# Altium PCB ATU.PcbDoc (part 1 of 2)
Units mm, origin at the board's own origin, x right, y up, seen from the top; angles counter-clockwise.
Board outline 168 x 90 mm, 2 copper layers (Top Layer, Bottom Layer), stack 1.571 mm thick; 161 components, 107 nets, 611 pads, 1151 vias.
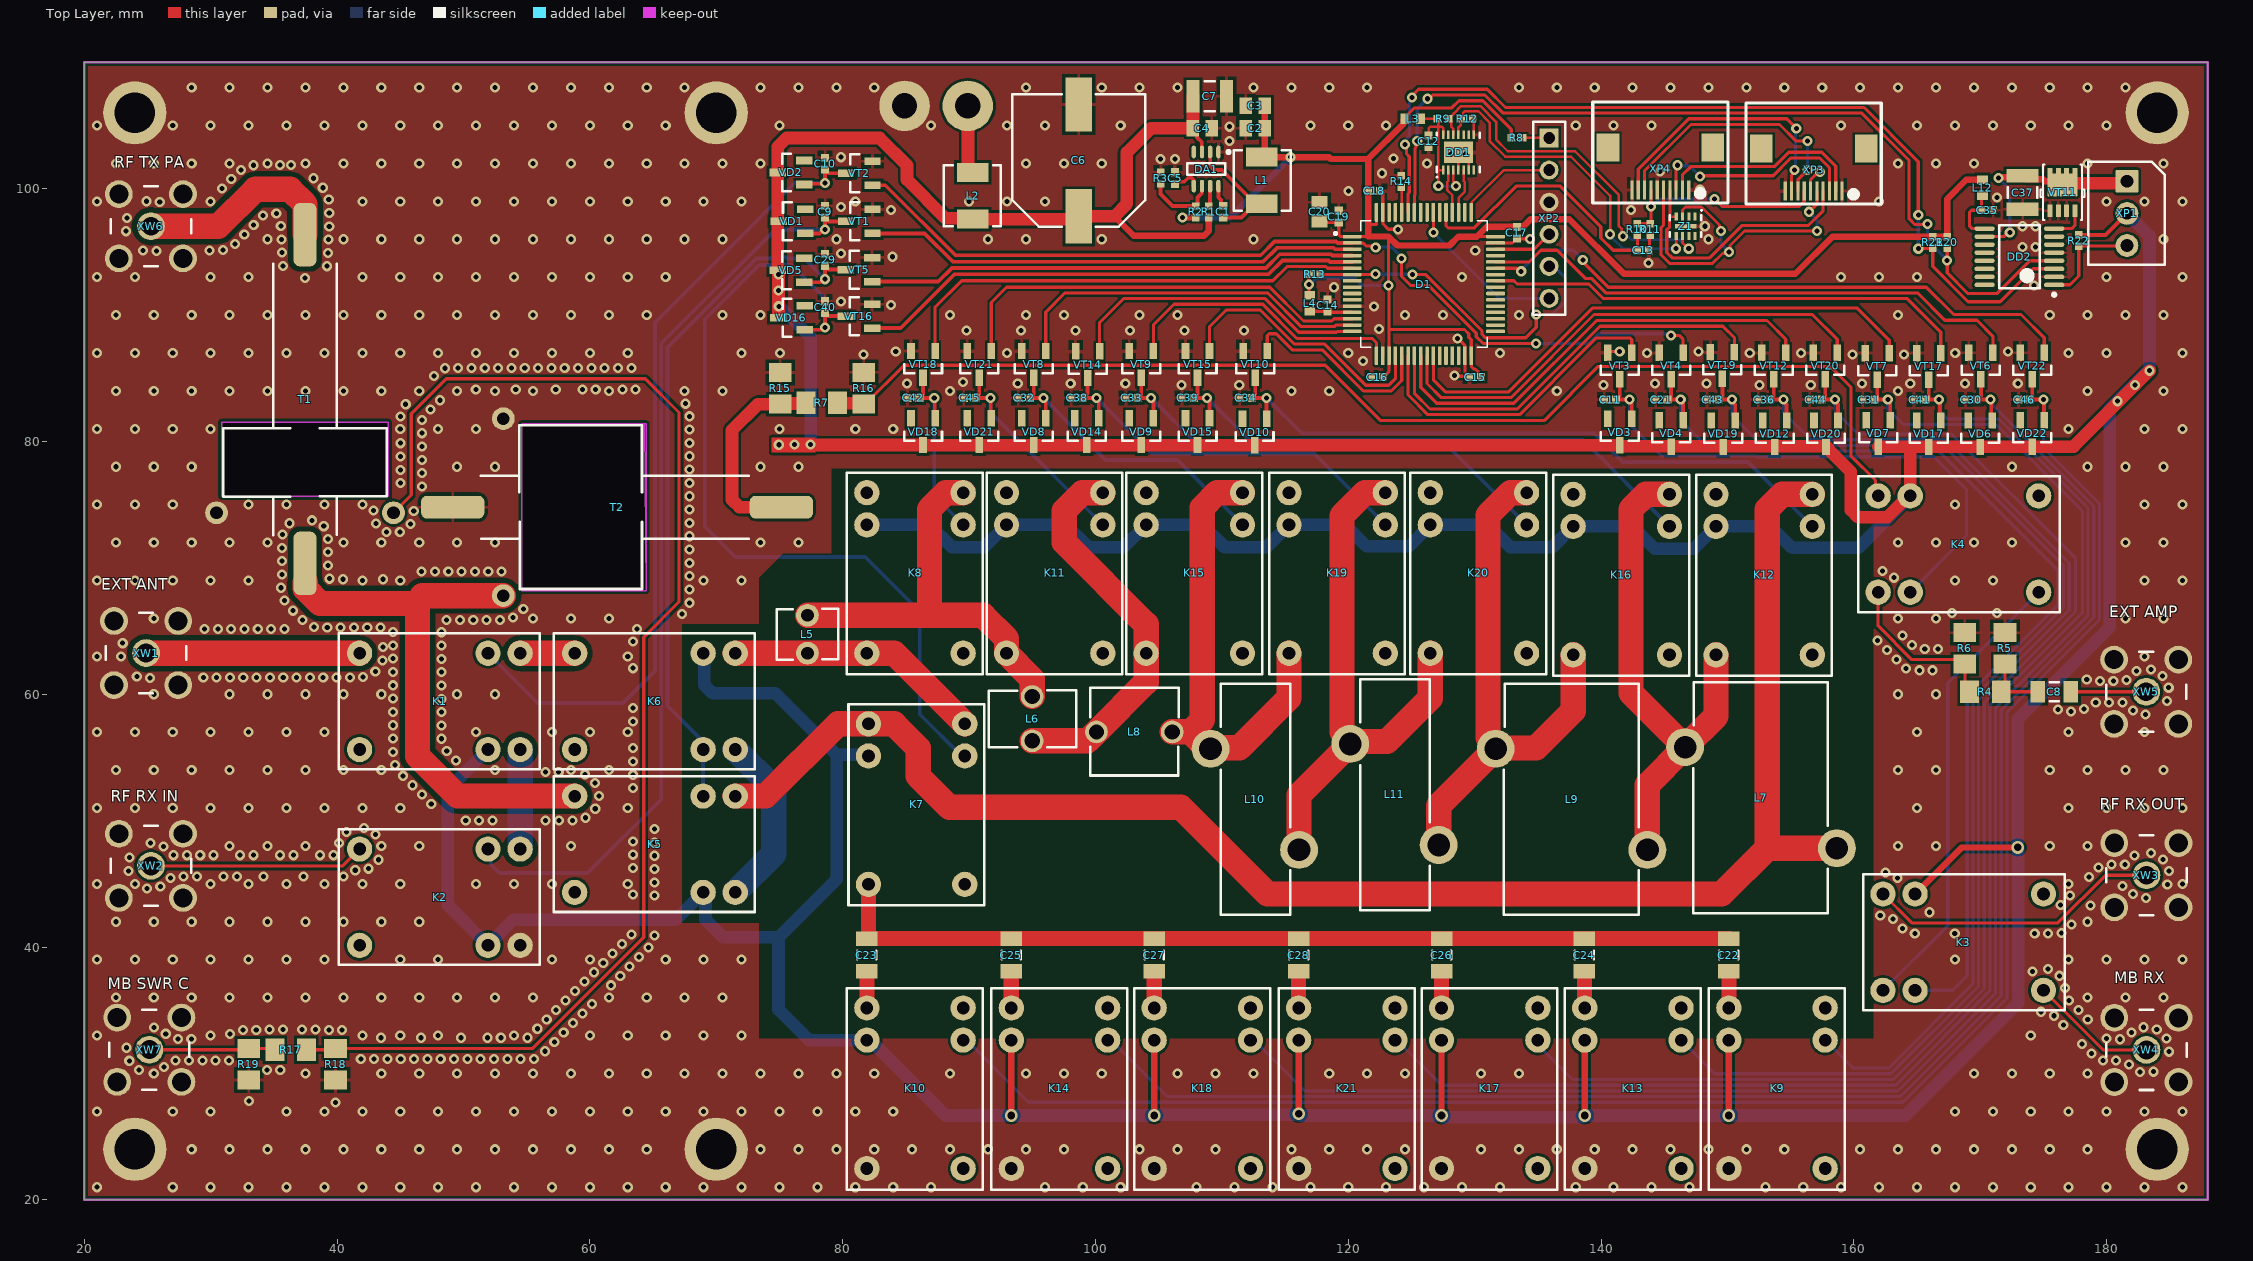
[diagram p0: Top Layer view]
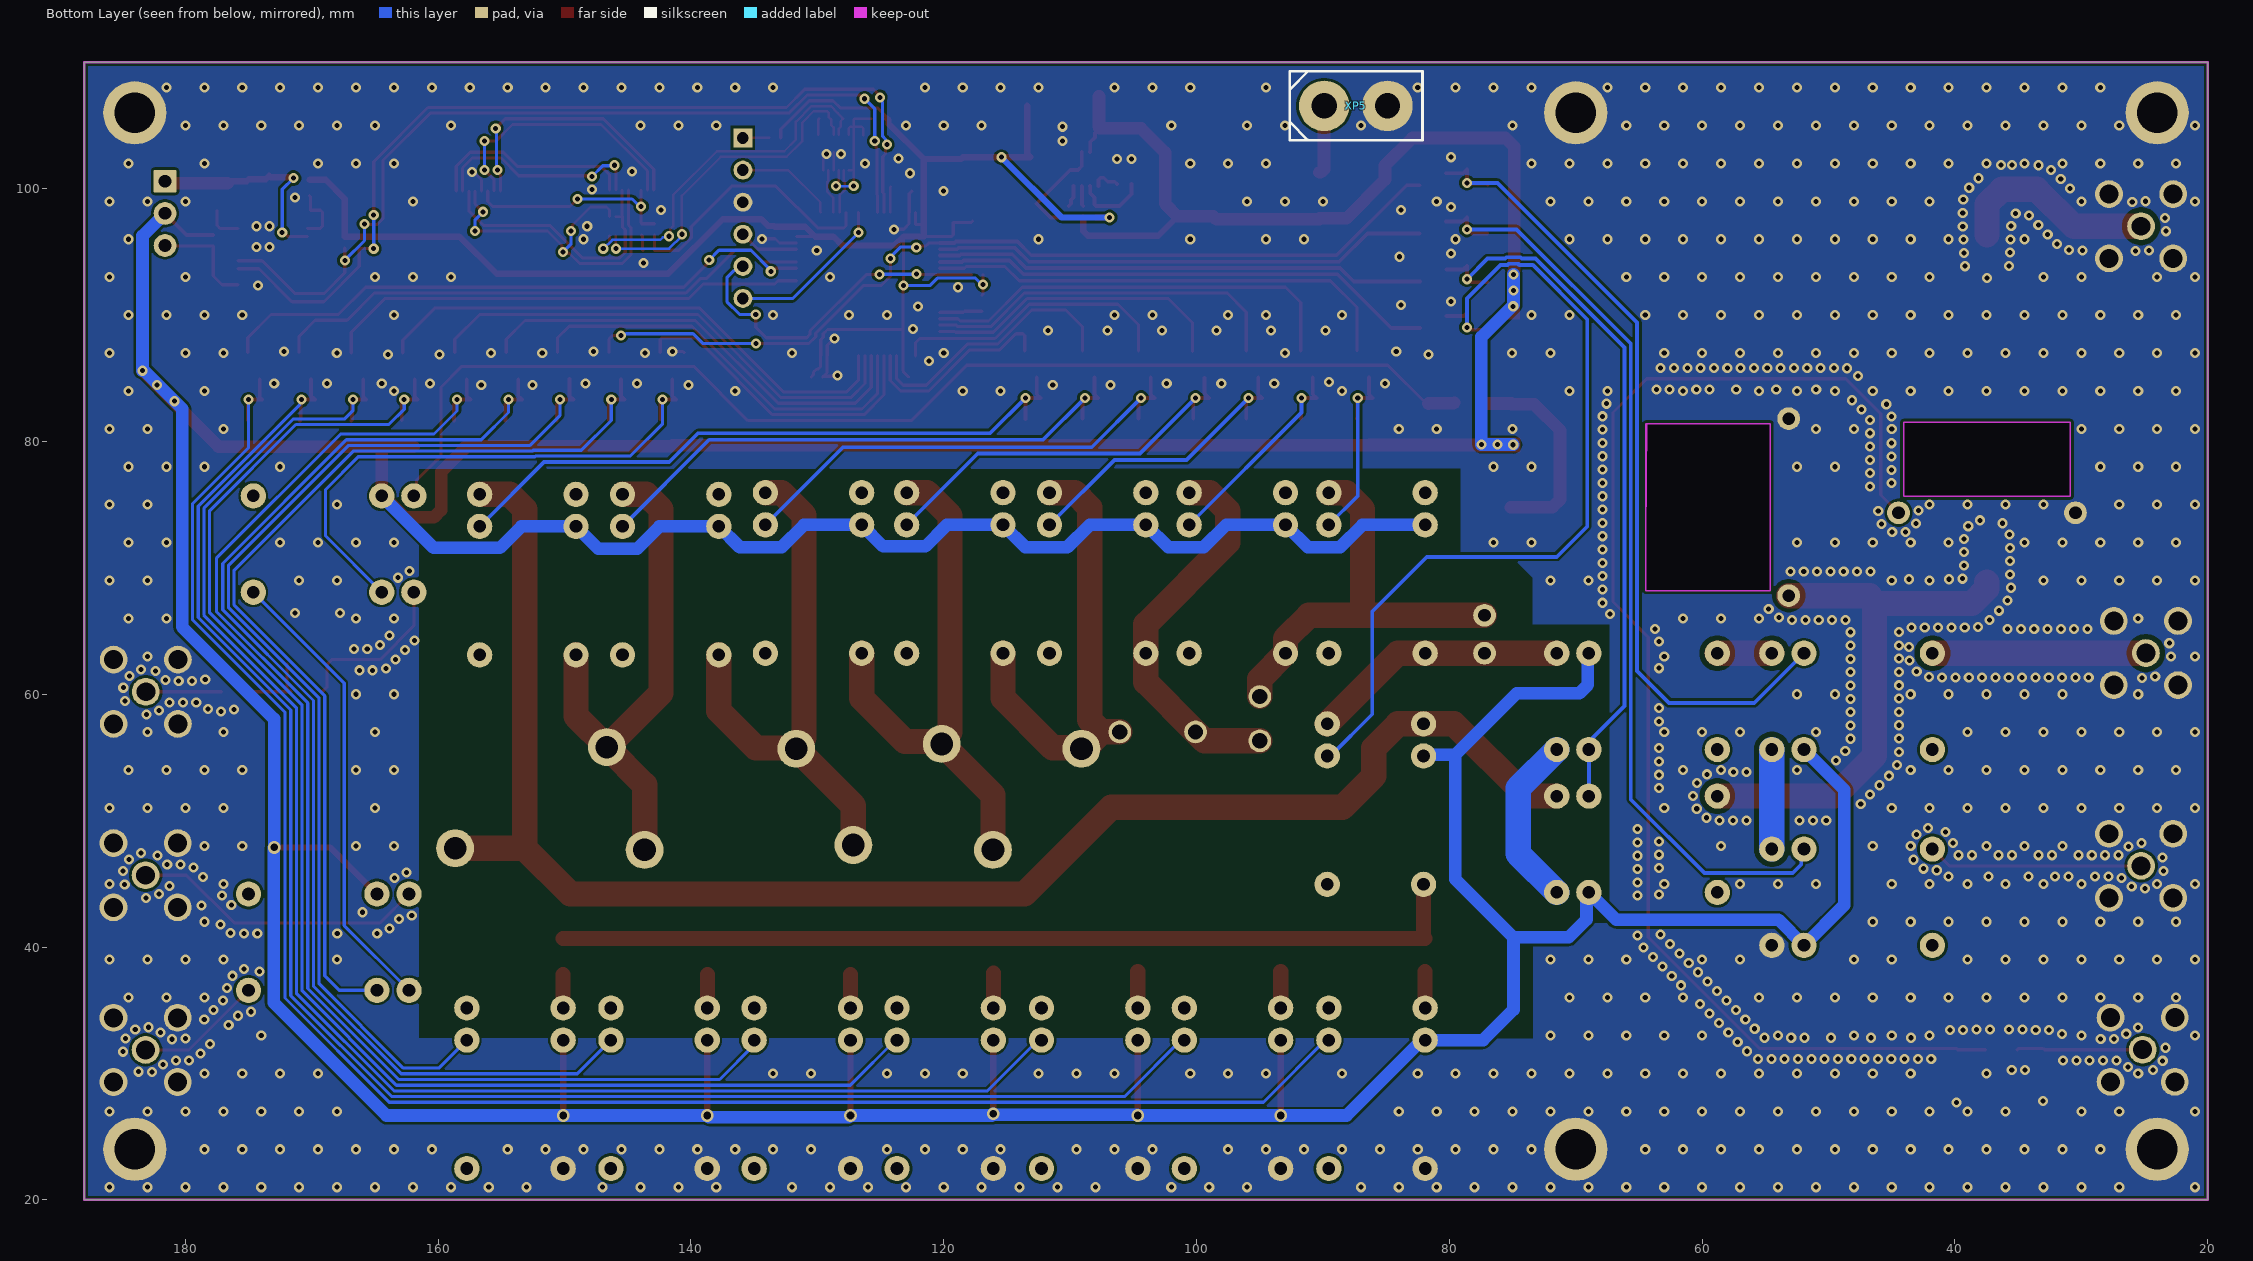
[diagram p1: Bottom Layer view, seen from below]

## Layer stack, top to bottom
Top Solder: solder mask 0.0102, Solder Resist, Dk 3.5
Top Layer: signal copper 0.0356
Dielectric 1: dielectric 1.5, FR-4, Dk 4.8
Bottom Layer: signal copper 0.0356
Bottom Solder: solder mask 0.0102, Solder Resist, Dk 3.5

## Board outline
20,20 188,20 188,110 20,110
cut-out: 54.61,81.407 54.61,68.199 64.452,68.199 64.325,81.407
cut-out: 30.861,81.534 44.069,81.534 44.069,75.658 30.861,75.658

## Design rules (kind name [scope] priority, off if disabled: settings)
Clearance Clearance_1 [(InNet('ATU_LC_IN') OR InNet('NetK1_1') OR InNet('NetT1_2') OR InNet('ATU_LC_OUT') OR InNet('NetK1_7'))] p1: gap=0.4 ignorepadtopadclearanceinfootprint=FALSE
Clearance [All] p2: gap=0.2 ignorepadtopadclearanceinfootprint=FALSE
HoleSize [All] p1: absolutevalues=TRUE maxlimit=5 minlimit=0.2 maxpercent=80.000 minpercent=20.000
PlaneConnect [All] p1: pad.planeconnectstyle=Relief pad.reliefexpansion=0.508 pad.reliefentries=4 pad.reliefconductorwidth=0.254 pad.reliefairgap=0.254 via.planeconnectstyle=Direct via.reliefexpansion=0.508 via.reliefentries=4 via.reliefconductorwidth=0.254 via.reliefairgap=0.254
PolygonConnect [All] p1: thpad.connectstyle=Direct thpad.reliefconductorwidth=0.254 thpad.reliefentries=4 thpad.polygonreliefangle="90 Angle" thpad.airgapwidth=0.254 smdpad.connectstyle=Relief smdpad.reliefconductorwidth=0.254 smdpad.reliefentries=4 smdpad.polygonreliefangle="90 Angle" smdpad.airgapwidth=0.254 via.connectstyle=Direct via.reliefconductorwidth=0.254 via.reliefentries=4 via.polygonreliefangle="90 Angle" via.airgapwidth=0.254
RoutingVias [All] p1: holewidth=0.4 width=0.8 viastyle="Through Hole" minholewidth=0.3 minwidth=0.7 maxholewidth=3.5 maxwidth=6
SolderMaskExpansion [All] p1: expansion=0.102 istentingtop=FALSE
SupplyNets "Schematic Supply Nets_10" [InNet('I2C_SCL')] p1: voltage=0.000
SupplyNets "Schematic Supply Nets_8" [InNet('I2C_SDA')] p2: voltage=0.000
SupplyNets "Schematic Supply Nets_54" [InNet('SEL_C0')] p3: voltage=0.000
SupplyNets "Schematic Supply Nets_53" [InNet('CON_RS422A')] p4: voltage=0.000
SupplyNets "Schematic Supply Nets_52" [InNet('RELAY_CSEL')] p5: voltage=0.000
SupplyNets "Schematic Supply Nets_51" [InNet('RELAY_L1')] p6: voltage=0.000
SupplyNets "Schematic Supply Nets_50" [InNet('RELAY_RXEN')] p7: voltage=0.000
SupplyNets "Schematic Supply Nets_49" [InNet('RX_EN')] p8: voltage=0.000
SupplyNets "Schematic Supply Nets_46" [InNet('PWR_EN')] p9: voltage=0.000
SupplyNets "Schematic Supply Nets_45" [InNet('CON_TXON')] p10: voltage=0.000
SupplyNets "Schematic Supply Nets_44" [InNet('RELAY_L2')] p11: voltage=0.000
SupplyNets "Schematic Supply Nets_43" [InNet('VDD_12V')] p12: voltage=0.000
SupplyNets "Schematic Supply Nets_42" [InNet('RELAY_C5')] p13: voltage=0.000
SupplyNets "Schematic Supply Nets_41" [InNet('RELAY_L6')] p14: voltage=0.000
SupplyNets "Schematic Supply Nets_40" [InNet('CON_RS422Z')] p15: voltage=0.000
SupplyNets "Schematic Supply Nets_39" [InNet('EXT_AMP')] p16: voltage=0.000
SupplyNets "Schematic Supply Nets_38" [InNet('SEL_C2')] p17: voltage=0.000
SupplyNets "Schematic Supply Nets_37" [InNet('RELAY_L4')] p18: voltage=0.000
SupplyNets "Schematic Supply Nets_36" [InNet('BYPASS0')] p19: voltage=0.000
SupplyNets "Schematic Supply Nets_35" [InNet('RELAY_L5')] p20: voltage=0.000
SupplyNets "Schematic Supply Nets_34" [InNet('SEL_L6')] p21: voltage=0.000
SupplyNets "Schematic Supply Nets_33" [InNet('RELAY_C0')] p22: voltage=0.000
SupplyNets "Schematic Supply Nets_32" [InNet('GND')] p23: voltage=0.000
SupplyNets "Schematic Supply Nets_31" [InNet('SEL_L4')] p24: voltage=0.000
SupplyNets "Schematic Supply Nets_30" [InNet('SEL_L5')] p25: voltage=0.000
SupplyNets "Schematic Supply Nets_29" [InNet('CON_RS422B')] p26: voltage=0.000
SupplyNets "Schematic Supply Nets_28" [InNet('RELAY_TXEN2')] p27: voltage=0.000
SupplyNets "Schematic Supply Nets_27" [InNet('RELAY_EXTA')] p28: voltage=0.000
SupplyNets "Schematic Supply Nets_26" [InNet('SEL_C4')] p29: voltage=0.000
SupplyNets "Schematic Supply Nets_25" [InNet('RELAY_TXEN')] p30: voltage=0.000
SupplyNets "Schematic Supply Nets_24" [InNet('RELAY_C4')] p31: voltage=0.000
SupplyNets "Schematic Supply Nets_23" [InNet('RELAY_C3')] p32: voltage=0.000
SupplyNets "Schematic Supply Nets_22" [InNet('VDD_3V3')] p33: voltage=0.000
SupplyNets "Schematic Supply Nets_21" [InNet('SEL_L3')] p34: voltage=0.000
SupplyNets "Schematic Supply Nets_20" [InNet('CAP_SEL')] p35: voltage=0.000
SupplyNets "Schematic Supply Nets_19" [InNet('RELAY_L3')] p36: voltage=0.000
SupplyNets "Schematic Supply Nets_18" [InNet('ATU_LC_IN')] p37: voltage=0.000
SupplyNets "Schematic Supply Nets_17" [InNet('SEL_L1')] p38: voltage=0.000
SupplyNets "Schematic Supply Nets_16" [InNet('RELAY_L7')] p39: voltage=0.000
SupplyNets "Schematic Supply Nets_15" [InNet('SEL_L7')] p40: voltage=0.000
SupplyNets "Schematic Supply Nets_14" [InNet('RELAY_BYP0')] p41: voltage=0.000
SupplyNets "Schematic Supply Nets_13" [InNet('SEL_L2')] p42: voltage=0.000
SupplyNets "Schematic Supply Nets_12" [InNet('RELAY_C6')] p43: voltage=0.000
SupplyNets "Schematic Supply Nets_11" [InNet('SEL_C5')] p44: voltage=0.000
SupplyNets "Schematic Supply Nets_9" [InNet('CON_TX_FAIL')] p45: voltage=0.000
SupplyNets "Schematic Supply Nets_7" [InNet('RELAY_C2')] p46: voltage=0.000
SupplyNets "Schematic Supply Nets_6" [InNet('CON_RS422Y')] p47: voltage=0.000
SupplyNets "Schematic Supply Nets_5" [InNet('SEL_C6')] p48: voltage=0.000
SupplyNets "Schematic Supply Nets_4" [InNet('ATU_LC_OUT')] p49: voltage=0.000
SupplyNets "Schematic Supply Nets_3" [InNet('SEL_C1')] p50: voltage=0.000
SupplyNets "Schematic Supply Nets_2" [InNet('SEL_C3')] p51: voltage=0.000
SupplyNets "Schematic Supply Nets_1" [InNet('RELAY_C1')] p52: voltage=0.000
SupplyNets "Schematic Supply Nets" [InNet('TX_EN')] p53: voltage=0.000
Width [All] p1: maxlimit=10 minlimit=0.2 preferedwidth=0.3
28 further rules are at their usual default settings.

## Classes and differential pairs
component class ATU_RF: C8 C9 C10 C11 C21 K1 K2 K3 K4 R4 R5 R6 R7 R15 R16 R17 R18 R19 T1 T2 VD1 VD2 VD3 VD4 VT1 VT2 VT3 VT4 XW1 XW2 XW3 XW4 XW5 XW6 XW7
component class ATU_MCU: C1 C2 C3 C4 C5 C6 C7 C12 C13 C14 C15 C16 C17 C18 C19 C20 C35 C37 D1 DA1 DD1 DD2 L1 L2 L3 L4 L12 R1 R2 R3 R8 R9 R10 R11 R12 R13 R14 R20 R21 R22 VT11 XP1 XP2 XP3 XP4 XP5 Z1
component class ATU_LC: C22 C23 C24 C25 C26 C27 C28 C29 C30 C31 C32 C33 C34 C36 C38 C39 C40 C41 C42 C43 C44 C45 C46 K5 K6 K7 K8 K9 K10 K11 K12 K13 K14 K15 K16 K17 K18 K19 K20 K21 L5 L6 L7 L8 L9 L10 L11 VD5 VD6 VD7 VD8 VD9 VD10 VD12 VD14 VD15 VD16 VD17 VD18 VD19 VD20 VD21 VD22 VT5 VT6 VT7 VT8 VT9 VT10 VT12 VT14 VT15 VT16 VT17 VT18 VT19 VT20 VT21 VT22

## Components (designator, comment, footprint, x,y, rotation, side; value= is the part's Value field where it differs from the comment)
C1 "0.1мк" CAPC1005X06N 110.109,98.171 r90 top
C2 "22мк" CAPC2012X12L 112.649,104.775 r0 top
C3 "22мк" CAPC2012X12L 112.649,106.553 r0 top
C4 "22мк" CAPC2012X12L 108.446,104.775 r180 top
C5 "8200" CAPC1005X06N 106.299,100.838 r270 top
C6 "470мк" CAPAE116103X105N 98.679,102.235 r90 top
C7 "10мк" CAPC3225X27L 109.038,107.315 r180 top
C8 "2200" CAPC3216X19L 175.865,60.198 r0 top
C9 "0.01мк" CAPC1005X06N 78.613,98.171 r270 top
C10 "0.01мк" CAPC1005X06N 78.613,101.981 r270 top
C11 "0.01мк" CAPC1005X06N 140.716,83.312 r0 top
C12 "1мк" CAPC1005X06N 126.365,103.759 r90 top
C13 "0.01мк" CAPC1005X06N 143.335,95.123 r180 top
C14 "0.1мк" CAPC1005X06N 118.364,90.757 r270 top
C15 "0.1мк" CAPC1005X06N 130.048,85.09 r0 top
C16 "0.1мк" CAPC1005X06N 122.301,85.09 r0 top
C17 "0.1мк" CAPC1005X06N 133.35,96.52 r90 top
C18 "0.1мк" CAPC1005X06N 122.047,99.822 r180 top
C19 "0.1мк" CAPC1005X06N 119.253,97.79 r270 top
C20 "22мк" CAPC2012X12L 117.729,98.171 r270 top
C21 "0.01мк" CAPC1005X06N 144.78,83.312 r0 top
C22 "22" CAPC3216X19L 150.114,39.37 r270 top
C23 "10" CAPC3216X19L 81.915,39.37 r90 top
C24 "100" CAPC3216X19L 138.684,39.37 r270 top
C25 "47" CAPC3216X19L 93.345,39.37 r90 top
C26 "470" CAPC3216X19L 127.381,39.37 r270 top
C27 "220" CAPC3216X19L 104.648,39.37 r90 top
C28 "1000" CAPC3216X19L 116.078,39.37 r90 top
C29 "0.01мк" CAPC1005X06N 78.613,94.361 r270 top
C30 "0.01мк" CAPC1005X06N 169.291,83.312 r0 top
C31 "0.01мк" CAPC1005X06N 161.163,83.312 r0 top
C32 "0.01мк" CAPC1005X06N 94.361,83.439 r0 top
C33 "0.01мк" CAPC1005X06N 102.87,83.439 r0 top
C34 "0.01мк" CAPC1005X06N 111.887,83.439 r0 top
C35 "0.1мк" CAPC1005X06N 170.561,98.298 r180 top
C36 "0.01мк" CAPC1005X06N 152.908,83.312 r0 top
C37 "10мк" CAPC3225X27L 173.355,99.695 r90 top
C38 "0.01мк" CAPC1005X06N 98.552,83.439 r0 top
C39 "0.01мк" CAPC1005X06N 107.315,83.439 r0 top
C40 "0.01мк" CAPC1005X06N 78.613,90.63 r270 top
C41 "0.01мк" CAPC1005X06N 165.227,83.312 r0 top
C42 "0.01мк" CAPC1005X06N 85.598,83.439 r0 top
C43 "0.01мк" CAPC1005X06N 148.844,83.312 r0 top
C44 "0.01мк" CAPC1005X06N 156.972,83.312 r0 top
C45 "0.01мк" CAPC1005X06N 90.043,83.439 r0 top
C46 "0.01мк" CAPC1005X06N 173.482,83.312 r0 top
D1 "STM32F103RCT6" QFP50P1200X1200X160-64N 125.984,92.456 r0 top
DA1 "TPS563210A" TSOP65P280X110-8N 108.753,101.553 r270 top
DD1 "MAX13433EETD+" SON40P300X80_HS-15L 128.721,102.868 r90 top
DD2 "MAX6650EUB" SOP64P600X175-16N 173.101,94.615 r180 top
K1 "HJR4102-L-12VDC-S-Z" HJR4102 51.943,55.626 r0 top
K2 "HJR4102-L-12VDC-S-Z" HJR4102 51.943,40.132 r0 top
K3 "HJR4102-L-12VDC-S-Z" HJR4102 164.846,44.196 r180 top
K4 "HJR4102-L-12VDC-S-Z" HJR4102 164.465,75.692 r180 top
K5 "HJR4102-L-12VDC-S-Z" HJR4102 68.961,44.323 r0 top
K6 "HJR4102-L-12VDC-S-Z" HJR4102 68.961,55.626 r0 top
K7 "HJR4102-L-12VDC-S-Z" HJR4102 89.662,55.118 r90 top
K8 "HJR4102-L-12VDC-S-Z" HJR4102 89.535,73.406 r90 top
K9 "HJR4102-L-12VDC-S-Z" HJR4102 157.734,32.639 r90 top
K10 "HJR4102-L-12VDC-S-Z" HJR4102 89.535,32.639 r90 top
K11 "HJR4102-L-12VDC-S-Z" HJR4102 100.584,73.406 r90 top
K12 "HJR4102-L-12VDC-S-Z" HJR4102 156.718,73.279 r90 top
K13 "HJR4102-L-12VDC-S-Z" HJR4102 146.334,32.639 r90 top
K14 "HJR4102-L-12VDC-S-Z" HJR4102 100.965,32.639 r90 top
K15 "HJR4102-L-12VDC-S-Z" HJR4102 111.633,73.406 r90 top
K16 "HJR4102-L-12VDC-S-Z" HJR4102 145.415,73.279 r90 top
K17 "HJR4102-L-12VDC-S-Z" HJR4102 135.001,32.639 r90 top
K18 "HJR4102-L-12VDC-S-Z" HJR4102 112.268,32.639 r90 top
K19 "HJR4102-L-12VDC-S-Z" HJR4102 122.936,73.406 r90 top
K20 "HJR4102-L-12VDC-S-Z" HJR4102 134.112,73.406 r90 top
K21 "HJR4102-L-12VDC-S-Z" HJR4102 123.698,32.639 r90 top
L1 "2,2мкГн" CSAB0420 113.157,100.656 r90 top
L2 "2,2мкГн" CSAB0420 90.297,99.441 r270 top
L3 "BLM18PG121SN1D" INDC1608X08L 125.095,105.537 r0 top
L4 "BLM18PG121SN1D" INDC1608X08L 116.967,90.932 r90 top
L5 "50 нГн" "COIL D4 W3 L3" 77.216,63.246 r90 top
L6 "100 нГн" "COIL D6.4 W4 L3.5" 94.996,59.817 r270 top
L7 "4.17vrГн" T68-2x2 152.654,51.816 r90 top
L8 "220 нГн" "COIL D6.4 W7 L6" 100.076,57.023 r0 top
L9 "1.93vrГн" T68-2x2 137.668,51.689 r90 top
L10 "462 нГн" T68-2 110.109,51.689 r90 top
L11 "963 нГн" T68-2 121.158,52.07 r90 top
L12 "BLM18PG121SN1D" INDC1608X08L 170.18,100.076 r270 top
R1 "10к" RESC1005X06N 108.966,98.171 r270 top
R2 "33к" RESC1005X06N 107.95,98.171 r270 top
R3 "10к" RESC1005X06N 105.156,100.838 r90 top
R4 "240" RESC3216X04L 170.414,60.198 r180 top
R5 "62" RESC3216X04L 171.958,63.627 r270 top
R6 "62" RESC3216X04L 168.783,63.627 r270 top
R7 "68" RESC3216X04L 78.359,83.058 r0 top
R8 "100" RESC1005X06N 133.35,104.013 r0 top
R9 "180к" RESC1005X06N 127.508,105.537 r180 top
R10 "100" RESC1005X06N 142.875,96.774 r270 top
R11 "10к" RESC1005X06N 143.891,96.774 r270 top
R12 "180к" RESC1005X06N 129.413,105.537 r180 top
R13 "10к" RESC1005X06N 117.348,93.218 r180 top
R14 "100" RESC1005X06N 124.206,100.584 r90 top
R15 "100" RESC3216X04L 75.057,84.201 r270 top
R16 "100" RESC3216X04L 81.661,84.221 r270 top
R17 "68" RESC3216X04L 36.322,31.877 r180 top
R18 "100" RESC3216X04L 39.878,30.734 r90 top
R19 "100" RESC3216X04L 33.02,30.734 r90 top
R20 "4.7к" RESC1005X06N 167.386,95.758 r90 top
R21 "4.7к" RESC1005X06N 166.243,95.758 r90 top
R22 "10к" RESC1005X06N 177.8,95.885 r90 top
T1 "Трансформатор SWR_CURRENT" "TRSF PA CURRENT" 37.465,78.359 r90 top
T2 "Трансформатор SWR_VOLTAGE" "TRSF PA VOLTAGE" 57.15,74.803 r0 top
VD1 "BAS16" SOT23_N 75.98,97.409 r180 top
VD2 "BAS16" SOT23_N 75.912,101.28 r180 top
VD3 "BAS16" SOT23_N 141.478,80.738 r270 top
VD4 "BAS16" SOT23_N 145.542,80.645 r270 top
VD5 "BAS16" SOT23_N 75.912,93.538 r180 top
VD6 "BAS16" SOT23_N 169.987,80.611 r270 top
VD7 "BAS16" SOT23_N 161.925,80.645 r270 top
VD8 "BAS16" SOT23_N 95.123,80.772 r270 top
VD9 "BAS16" SOT23_N 103.632,80.772 r270 top
VD10 "BAS16" SOT23_N 112.588,80.738 r270 top
VD12 "BAS16" SOT23_N 153.731,80.611 r270 top
VD14 "BAS16" SOT23_N 99.314,80.772 r270 top
VD15 "BAS16" SOT23_N 108.077,80.772 r270 top
VD16 "BAS16" SOT23_N 75.946,89.789 r180 top
VD17 "BAS16" SOT23_N 165.928,80.611 r270 top
VD18 "BAS16" SOT23_N 86.36,80.772 r270 top
VD19 "BAS16" SOT23_N 149.667,80.611 r270 top
VD20 "BAS16" SOT23_N 157.8,80.611 r270 top
VD21 "BAS16" SOT23_N 90.805,80.772 r270 top
VD22 "BAS16" SOT23_N 174.117,80.645 r270 top
VT1 "PDTC114ET" SOT23_N 81.314,97.409 r180 top
VT2 "PDTC114ET" SOT23_N 81.314,101.219 r180 top
VT3 "PDTC114ET" SOT23_N 141.478,85.979 r270 top
VT4 "PDTC114ET" SOT23_N 145.542,85.979 r270 top
VT5 "PDTC114ET" SOT23_N 81.28,93.599 r180 top
VT6 "PDTC114ET" SOT23_N 170.053,85.979 r270 top
VT7 "PDTC114ET" SOT23_N 161.859,85.945 r270 top
VT8 "PDTC114ET" SOT23_N 95.123,86.106 r270 top
VT9 "PDTC114ET" SOT23_N 103.632,86.106 r270 top
VT10 "PDTC114ET" SOT23_N 112.649,86.106 r270 top
VT11 "SiSS10DN" PowerPAK_1212-8W 176.53,99.822 r90 top
VT12 "PDTC114ET" SOT23_N 153.67,85.979 r270 top
VT14 "PDTC114ET" SOT23_N 99.38,86.072 r270 top
VT15 "PDTC114ET" SOT23_N 108.077,86.106 r270 top
VT16 "PDTC114ET" SOT23_N 81.28,89.916 r180 top
VT17 "PDTC114ET" SOT23_N 165.928,85.945 r270 top
VT18 "PDTC114ET" SOT23_N 86.36,86.106 r270 top
VT19 "PDTC114ET" SOT23_N 149.606,86.013 r270 top
VT20 "PDTC114ET" SOT23_N 157.734,85.979 r270 top
VT21 "PDTC114ET" SOT23_N 90.805,86.106 r270 top
VT22 "PDTC114ET" SOT23_N 174.117,85.979 r270 top
XP1 "22232031" 22232031 181.61,98.044 r90 top
XP2 "PLS-6" HDR1X6 135.89,104.013 r270 top
XP3 "FH12-10S-0.5SVA" FH12-10S-0.5SH 156.825,99.822 r180 top
XP4 "FH12-10S-0.5SVA" FH12-10S-0.5SH 144.694,99.901 r180 top
XP5 "XT30UPB-M" XT30UPB-M 87.399,106.553 r180 bottom
XW1 "SMA-JR" SMA-JR 24.892,63.259 r270 top
XW2 "SMA-JR" SMA-JR 25.273,46.425 r270 top
XW3 "SMA-JR" SMA-JR 183.147,45.682 r90 top
XW4 "SMA-JR" SMA-JR 183.147,31.864 r90 top
XW5 "SMA-JR" SMA-JR 183.134,60.198 r90 top
XW6 "SMA-JR" SMA-JR 25.273,97.028 r270 top
XW7 "SMA-JR" SMA-JR 25.146,31.877 r270 top
Z1 "EClamp2394P" SON50P160X65_HS-9N 146.697,97.031 r270 top

## Footprints (in the part's own frame and the unit in brackets; to place one, negate y for a bottom-side part, rotate by r counter-clockwise, add the part's x,y. Pads: shape width x height; smd on the part's side, far side on the other; paste and mask are expansions set on the pad)
22232031 [mm]
  rrect10% 1.8x1.8 hole 1 mask+0.05: 1(2.54,0)
  round 1.8 hole 1 mask+0.05: 2(0,0) 3(-2.54,0)
  silkscreen extent -4.08,-3 4.1,3.08, body extent -3.81,-2.9 3.81,2.9, height 11.72
CAPAE116103X105N [mm] "Aluminum Electrolytic Capacitor, Body 10,30x10,30x10,50mm, IPC Medium Density"
  rect 4.3x2.1 smd: 1(-4.425,0) 2(4.425,0)
  silkscreen extent -5.25,-5.25 5.25,5.25, body extent -5.5,-5.2 5.5,5.2, height 10.41
CAPC1005X06N [mm] "Chip Capacitor, 2-Leads, Body 1,00x0,50mm, IPC Medium Density"
  rect 0.64x0.64 smd mask+0.05: 1(-0.46,0) 2(0.46,0)
  body extent -0.55,-0.3 0.55,0.3, height 0.6
CAPC2012X12L [mm] "Chip Capacitor, 2-Leads, Body 2,00x1,25mm, IPC High Density"
  rect 1x1.3 smd mask+0.05: 1(-0.75,0) 2(0.75,0)
  body extent -1.05,-0.67 1.05,0.67, height 1.25
CAPC3216X19L [mm] "Chip Capacitor, 2-Leads, Body 3,20x1,60mm, IPC High Density"
  rect 1.15x1.7 smd: 1(-1.3,0) 2(1.3,0)
  silkscreen extent -0.35,-0.75 0.35,0.75, body extent -1.68,-0.87 1.68,0.87, height 1.9
CAPC3225X27L [mm] "Chip Capacitor, 2-Leads, Body 3,20x2,50mm, IPC High Density"
  rect 1.05x2.55 smd: 1(-1.325,0) 2(1.325,0)
  silkscreen extent -0.4,-1.17 0.4,1.18, body extent -1.6,-1.25 1.6,1.25, height 2.7
"COIL D4 W3 L3" [mm]
  round 1.8 hole 1: 1(0,0) 2(3,0)
  silkscreen extent -0.5,-2.42 3.5,2.42, body extent -0.25,-2.25 3.25,2.25, height 5.25
"COIL D6.4 W4 L3.5" [mm]
  round 1.8 hole 1.2: 1(0,0) 2(3.5,0)
  silkscreen extent -0.5,-3.45 4,3.5, body extent -0.4,-3.4 3.9,3.4, height 7.4
"COIL D6.4 W7 L6" [mm]
  round 1.8 hole 1.2: 1(0,0) 2(6,0)
  silkscreen extent -0.5,-3.45 6.53,3.5, body extent -0.4,-3.4 6.4,3.4, height 7.4
CSAB0420 [mm] "Wire Wound Inductor, 2-Leads,"
  rect 1.5x2.5 smd: 1(-1.85,0) 2(1.85,0)
  silkscreen extent -2.4,-2.3 2.4,2.2, body extent -2.35,-2.1 2.35,2.1, height 1.85
FH12-10S-0.5SH [mm] "FFC/FPC Connector 10 Circuits"
  rect 1.8x2.2 smd mask+0.051: 0(-4.15,-3.35) 0(4.15,-3.35)
  rect 0.25x1.5 smd mask+0.051: 1(-2.25,0) 2(-1.75,0) 3(-1.25,0) 4(-0.75,0) 5(-0.25,0) 6(0.25,0) 7(0.75,0) 8(1.25,0) 9(1.75,0) 10(2.25,0)
  silkscreen extent -5.35,-6.95 5.35,1.02, body extent -4.55,-6.35 4.55,0.05, height 2.14
HDR1X6 [mm]
  rect 1.5x1.5 hole 0.92: 1(0,0)
  round 1.5 hole 0.92: 2(2.54,0) 3(5.08,0) 4(7.62,0) 5(10.16,0) 6(12.7,0)
  silkscreen extent -1.27,-1.27 13.97,1.27, body extent -1.25,-1.22 13.89,1.28, height 8.2
HJR4102 [mm]
  round 2 hole 1: 1(-10.16,7.62) 5(0,7.62) 6(2.54,7.62) 7(2.54,0) 8(0,0) 12(-10.16,0)
  silkscreen extent -11.83,-1.55 4.1,9.2, body extent -11.58,-1.37 3.92,9.03, height 11.7
INDC1608X08L [mm] "Chip Inductor, 2-Leads, Body 1,60x0,80mm, IPC High Density"
  rect 0.69x0.84 smd: 1(-0.63,0) 2(0.63,0)
  body extent -0.8,-0.4 0.8,0.4, height 0.95
PowerPAK_1212-8W [mm]
  rrect10% 1.8x2.4 smd mask+0.05: D(0.47,0.02)
  rrect10% 1x0.4 smd mask+0.05: D(1.33,-0.97) D(1.33,-0.31) D(1.33,0.35) D(1.33,1.01) G(-1.57,-0.97) S(-1.57,0.35) S(-1.57,1.01) S(-1.57,-0.31)
  silkscreen extent -2.29,-1.71 2.08,1.75, body extent -1.65,-1.53 1.65,1.53, height 1.04
QFP50P1200X1200X160-64N [mm]
  rrect50% 1.49x0.28 smd: 1(-5.67,3.75) 2(-5.67,3.25) 3(-5.67,2.75) 4(-5.67,2.25) 5(-5.67,1.75) 6(-5.67,1.25) 7(-5.67,0.75) 8(-5.67,0.25) 9(-5.67,-0.25) 10(-5.67,-0.75) 11(-5.67,-1.25) 12(-5.67,-1.75) 13(-5.67,-2.25) 14(-5.67,-2.75) 15(-5.67,-3.25) 16(-5.67,-3.75) 33(5.67,-3.75) 34(5.67,-3.25) 35(5.67,-2.75) 36(5.67,-2.25) 37(5.67,-1.75) 38(5.67,-1.25) 39(5.67,-0.75) 40(5.67,-0.25) 41(5.67,0.25) 42(5.67,0.75) 43(5.67,1.25) 44(5.67,1.75) 45(5.67,2.25) 46(5.67,2.75) 47(5.67,3.25) 48(5.67,3.75)
  rrect50% 0.28x1.49 smd: 17(-3.75,-5.67) 18(-3.25,-5.67) 19(-2.75,-5.67) 20(-2.25,-5.67) 21(-1.75,-5.67) 22(-1.25,-5.67) 23(-0.75,-5.67) 24(-0.25,-5.67) 25(0.25,-5.67) 26(0.75,-5.67) 27(1.25,-5.67) 28(1.75,-5.67) 29(2.25,-5.67) 30(2.75,-5.67) 31(3.25,-5.67) 32(3.75,-5.67) 49(3.75,5.67) 50(3.25,5.67) 51(2.75,5.67) 52(2.25,5.67) 53(1.75,5.67) 54(1.25,5.67) 55(0.75,5.67) 56(0.25,5.67) 57(-0.25,5.67) 58(-0.75,5.67) 59(-1.25,5.67) 60(-1.75,5.67) 61(-2.25,5.67) 62(-2.75,5.67) 63(-3.25,5.67) 64(-3.75,5.67)
  silkscreen extent -7.1,-5 5,5, body extent -6,-6 6,6, height 0.72
RESC1005X06N [mm] "Chip Resistor, 2-Leads, Body 1,00x0,50mm, IPC Medium Density"
  rect 0.6x0.6 smd mask+0.05: 1(-0.45,0) 2(0.45,0)
  body extent -0.55,-0.3 0.55,0.3, height 0.6
RESC3216X04L [mm] "Chip Resistor, 2-Leads, Body 3,20x1,60mm, IPC High Density"
  rect 1.5x1.8 smd: 1(-1.25,0) 2(1.25,0)
  body extent -1.68,-0.87 1.68,0.87, height 0.44
SMA-JR [mm] "Connector; RF Coaxial, SMA, SM; 5 Position; Vertical - Large Pad Version"
  round 2.2 hole 1.5: 1(0,0) 2(-2.54,2.54) 2(-2.54,-2.54) 2(2.54,2.54) 2(2.54,-2.54)
  silkscreen extent -3.17,-3.17 3.17,3.17, body extent -3.5,-11.6 3.5,3.5, height 10.16
SON40P300X80_HS-15L [mm] "SON, 14-Leads, Body 3.00x3.00mm, Pitch 0.40mm, Thermal Pad 2.30x1.69mm, IPC High Density"
  rect 0.7x0.2 smd mask+0.075: 1(-1.395,1.2) 2(-1.395,0.8) 3(-1.395,0.4) 4(-1.395,0) 5(-1.395,-0.4) 6(-1.395,-0.8) 7(-1.395,-1.2) 8(1.395,-1.2) 9(1.395,-0.8) 10(1.395,-0.4) 11(1.395,0) 12(1.395,0.4) 13(1.395,0.8) 14(1.395,1.2)
  rect 1.69x2.3 smd mask+0.075: 15(0,0)
  silkscreen extent -2,-1.7 1.55,1.75, body extent -1.5,-1.5 1.5,1.5, height 0.73
SON50P160X65_HS-9N [mm] "SON, 8-Leads, Body 2,10x1,60mm, Pitch 0,50mm, Thermal Pad 1,68x0,33mm, IPC Medium Density"
  rect 0.63x0.25 smd mask+0.05: 1(-0.765,0.75) 2(-0.765,0.25) 3(-0.765,-0.25) 4(-0.765,-0.75) 5(0.765,-0.75) 6(0.765,-0.25) 7(0.765,0.25) 8(0.765,0.75)
  rect 0.33x1.68 smd mask+0.05: 9(0,0)
  silkscreen extent -1.3,-1.25 0.85,1.3, body extent -0.85,-1.1 0.85,1.1, height 0.65
SOP64P600X175-16N [mm] "SOP, 16-Leads, Body 4,89x3,90mm, Pitch 0,64mm, IPC Medium Density"
  oval 1.6x0.36 smd: 1(-2.75,2.222) 2(-2.75,1.587) 3(-2.75,0.952) 4(-2.75,0.317) 5(-2.75,-0.318) 6(-2.75,-0.953) 7(-2.75,-1.588) 8(-2.75,-2.223) 9(2.75,-2.222) 10(2.75,-1.587) 11(2.75,-0.952) 12(2.75,-0.317) 13(2.75,0.318) 14(2.75,0.953) 15(2.75,1.588) 16(2.75,2.223)
  silkscreen extent -2.88,-2.5 1.6,3.12, body extent -3.01,-2.5 3.01,2.5, height 1.75
SOT23_N [mm] "SOT23, 3-Leads, Body 2.9x1.3mm, Pitch 0.95mm, Lead Span 2.3mm, IPC Medium Density"
  rect 1.3x0.6 smd: 1(-1.05,0.95) 2(-1.05,-0.95) 3(1.05,0)
  silkscreen extent 0,-1.5 0.7,1.5, body extent -1.25,-1.46 1.23,1.46, height 1
T68-2 [mm]
  round 3 hole 1.8: 1(4,1) 2(-4,-6)
  silkscreen extent -9.15,-5.3 9.13,0.21, body extent -8.9,-5.1 8.9,0, height 17.66
T68-2x2 [mm]
  round 3 hole 1.8: 1(4,6) 2(-4,-6)
  silkscreen extent -9.15,-5.3 9.13,5.35, body extent -8.9,-5.1 8.9,5.1, height 17.66
"TRSF PA CURRENT" [mm]
  rrect50% 5x1.8 smd: 1(-8,0) 2(18,0)
  round 1.8 hole 1: 3(-4,7) 4(-4,-7)
  silkscreen extent -5.77,-6.48 15.7,6.48, body extent -9.99,-6.34 20.01,6.33, height 8.55
"TRSF PA VOLTAGE" [mm]
  rrect50% 5x1.8 smd: 1(-8,0) 2(18,0)
  round 1.8 hole 1: 3(-4,7) 4(-4,-7)
  silkscreen extent -5.77,-6.48 15.43,6.48, body extent -10.26,-6.36 19.74,6.34, height 8.55
TSOP65P280X110-8N [mm] "TSOP, 8-Leads, Body 2,90x1,60mm, Pitch 0,65mm, IPC Medium Density"
  oval 1x0.35 smd: 1(-1.35,0.975) 2(-1.35,0.325) 3(-1.35,-0.325) 4(-1.35,-0.975) 5(1.35,-0.975) 6(1.35,-0.325) 7(1.35,0.325) 8(1.35,0.975)
  silkscreen extent -1.47,-1.5 0.45,1.9, body extent -1.4,-1.5 1.4,1.5, height 1.1
XT30UPB-M [mm]
  round 4 hole 2: 1(-2.5,0) 2(2.5,0)
  silkscreen extent -5.23,-2.73 5.28,2.75, body extent -5.07,-2.6 5.13,2.6, height 9.4

## Part data
C1 C14 C15 C16 C17 C18 C19 C35: library part "Кер.ЧИП конд. 0402 0.1мкФ X7R 10%, 16В", "Кер. ЧИП-конденсатор", Power/Voltage=16В, Tolerance=±10%, PackageReference=0402, TKE=X7R
C2 C3 C4 C20: library part "Кер.ЧИП конд. 0805 22мкФ X5R 10% 16В", "Кер. ЧИП-конденсатор", Manufacturer=TDK, ManufacturerPartNumber=C2012X5R1C226KT, Power/Voltage=16В, Tolerance=±10%, TKE=X5R
C5: library part "Кер.ЧИП конд. 0402 8200пФ X7R 10%, 50В", "Кер. ЧИП-конденсатор", Power/Voltage=50В, Tolerance=±20%, TKE=X7R
C6: library part "Конденсатор гибридный SMD 470мкФ ±20% 25В", "Гибридный ЧИП-конденсатор", Manufacturer=Panasonic, ManufacturerPartNumber=EEHZK1E471P, Power/Voltage=25В, Tolerance=±20%, LatestRevisionDate=29-May-2009, LatestRevisionNote="IPC-7351 Footprint Added.", PackageDescription="ZK series", PackageReference="ZK series", Published=8-Jun-2000, Publisher="Altium Limited"
C7 C37: library part "Кер.ЧИП конд. 1210 10мкФ X5R 20% 50В", "Кер. ЧИП-конденсатор", Manufacturer=Murata, ManufacturerPartNumber=GRM32ER71H106, Power/Voltage=50В, Tolerance=±20%, TKE=X5R
C8: library part "Кер.ЧИП конд. 1206 2200пФ X7К 10% 1000В", "Кер. ЧИП-конденсатор", Manufacturer=WALSIN, ManufacturerPartNumber=1206B222K102, Power/Voltage=1000В, Tolerance=±10%, TKE=X7R
C9 C10 C11 C13 C21 C29 C30 C31 C32 C33 C34 C36 C38 C39 C40 C41 C42 C43 C44 C45 C46: library part "Кер.ЧИП конд. 0402 0.01мкФ X7R 10%, 50В", "Кер. ЧИП-конденсатор", Power/Voltage=50В, Tolerance=±20%, TKE=X7R
C12: library part "Кер.ЧИП конд. 0402 1мкФ X5R 10%, 10В", "Кер. ЧИП-конденсатор", Power/Voltage=10В, Tolerance=±10%, PackageReference=0402, TKE=X5R
C22: library part "Кер.ЧИП конд. 1206 22пФ NP0 5% 2000В", "Кер. ЧИП-конденсатор", Manufacturer=WALSIN, ManufacturerPartNumber=1206N220J202, Power/Voltage=2000В, Tolerance=±5%, TKE=NP0
C23: library part "Кер.ЧИП конд. 1206 10пФ NP0 5% 2000В", "Кер. ЧИП-конденсатор", Manufacturer=WALSIN, ManufacturerPartNumber=1206N100J202, Power/Voltage=2000В, Tolerance=±5%, TKE=NP0
C24: library part "Кер.ЧИП конд. 1206 100пФ NP0 5% 2000В", "Кер. ЧИП-конденсатор", Manufacturer=WALSIN, ManufacturerPartNumber=1206N101J202, Power/Voltage=2000В, Tolerance=±5%, TKE=NP0
C25: library part "Кер.ЧИП конд. 1206 47пФ NP0 5% 2000В", "Кер. ЧИП-конденсатор", Manufacturer=WALSIN, ManufacturerPartNumber=1206N470J202, Power/Voltage=2000В, Tolerance=±5%, TKE=NP0
C26: library part "Кер.ЧИП конд. 1206 470пФ NP0 10% 2000В", "Кер. ЧИП-конденсатор", Manufacturer=WALSIN, ManufacturerPartNumber=1206B471K202, Power/Voltage=2000В, Tolerance=±10%, TKE=NP0
C27: library part "Кер.ЧИП конд. 1206 220пФ NP0 5% 2000В", "Кер. ЧИП-конденсатор", Manufacturer=Johanson, ManufacturerPartNumber=202R18W102KV4E, Power/Voltage=2000В, Tolerance=±10%, TKE=X7R
C28: library part "Кер.ЧИП конд. 1206 1000пФ X7К 10% 2000В", "Кер. ЧИП-конденсатор", Manufacturer=Johanson, ManufacturerPartNumber=202R18W102KV4E, Power/Voltage=2000В, Tolerance=±10%, TKE=X7R
D1: library part "Микросхема STM32F103RCT6", "Ultra-low-power 32-bit MCU ARM®-based Cortex®-M3, 128KB Flash, 16KB SRAM, 4KB EEPROM, LCD, USB, ADC, DAC", Manufacturer=STMicroelectronics, Code_JEDEC=MS-026, ComponentLink1Description="Manufacturer Link", ComponentLink3Description="Packaging Specification", Published=29-Jan-2009
DA1: library part "Микросхема TPS563210A", "TPS56x210A, 4.5-V to 17-V Input, 2-A, 3-A Synchrono", Manufacturer=TI
DD1: library part "Микросхема MAX13433EETD+", "RS-422 Transceivers with Low-Voltage Logic Interface 16M", Manufacturer=Maxim, ComponentLink1Description=datasheet, ComponentLink1URL=https://datasheets.maximintegrated.com/en/ds/MAX13430E-MAX13433E.pdf
DD2: library part "Микросхема MAX6650EUB", "Fan-Speed Regulators and Monitors with SMBus/I2C-Compatible Interface", Manufacturer=Maxim, ComponentLink1Description=datasheet, ComponentLink1URL=https://www.analog.com/media/en/technical-documentation/data-sheets/MAX6650-MAX6651.pdf
K1 K2 K3 K4 K5 K6 K7 K8 K9 K10 K11 K12 K13 K14 K15 K16 K17 K18 K19 K20 K21: library part "Реле HJR4102-L-12VDC-S-Z", "Реле 1пер. 12VDC, 1A/240VAC", ComponentLink1Description=datasheet, ComponentLink1URL=https://www.ti.com/lit/ds/symlink/tlvh431a.pdf?ts=1606914625003&ref_url=https%253A%252F%252Fwww.google.com%252F
L1 L2: library part "ЧИП индуктивность CSAB0420-2R2M", "Molding Power Choke", Manufacturer=Vishay, ManufacturerPartNumber=IHLP1616ABER1R0M11
L3 L4 L12: library part "ЧИП дроссель 0603 BLM18PG121SN1D", "SMD EMI Suppression Filter EMIFIL", Manufacturer=Murata, ManufacturerPartNumber=BLM18PG121SN1D
L5: library part "Индуктивность 50 нГн", "3 витка, диаметр 4мм, длина 3мм, провод 0,5мм"
L6: library part "Индуктивность  100 нГн", "4 витка, диаметр 6мм, длина 3.5мм, провод 0.8мм"
L7: library part "Индуктивность 2XT68-2 4.17vrГн", "13 витков на 2 кольцах"
L8: library part "Индуктивность 220 нГн", "7 витков, диаметр 6мм, длина 6мм, провод 0.8мм"
L9: library part "Индуктивность 2XT68-2 1.93vrГн", "13 витков на 2 кольцах"
L10: library part "Индуктивность T68-2 462 нГн", "9 витков"
L11: library part "Индуктивность T68-2 963 нГн", "13 витков"
R1: library part "Чип резистор 0402 10 кОм, 1%", "ЧИП-резистор", Tolerance=±5%, PackageReference=0402, TKE="100 ppm/°С"
R2: library part "Чип резистор 0402 33 кОм, 5%", "ЧИП-резистор", Tolerance=±5%, PackageReference=0402, TKE="100 ppm/°С"
R3 R11 R13 R22: library part "Чип резистор 0402 10 кОм, 5%", "ЧИП-резистор", Tolerance=±5%, PackageReference=0402, TKE="100 ppm/°С"
R4: library part "Чип резистор 1206 240 Ом, 5%", "ЧИП-резистор", Manufacturer=ROHM, Tolerance=±5%, PackageReference=1206, TKE="300 ppm/°С"
R5 R6: library part "Чип резистор 1206 62 Ом, 5%", "ЧИП-резистор", Manufacturer=ROHM, Tolerance=±5%, PackageReference=1206, TKE="300 ppm/°С"
R7 R17: library part "Чип резистор 1206 68 Ом, 5%", "ЧИП-резистор", Manufacturer=ROHM, Tolerance=±5%, PackageReference=1206, TKE="300 ppm/°С"
R8 R10 R14: library part "Чип резистор 0402 100 Ом, 5%", "ЧИП-резистор", Tolerance=±5%, PackageReference=0402, TKE="100 ppm/°С"
R9 R12: library part "Чип резистор 0402 180 кОм, 5%", "ЧИП-резистор", Tolerance=±5%, PackageReference=0402, TKE="100 ppm/°С"
R15 R16 R18 R19: library part "Чип резистор 1206 100 Ом, 5%", "ЧИП-резистор", Manufacturer=ROHM, Tolerance=±5%, PackageReference=1206, TKE="300 ppm/°С"
R20 R21: library part "Чип резистор 0402 4,7 кОм, 5%", "ЧИП-резистор", Tolerance=±5%, PackageReference=0402, TKE="100 ppm/°С"
VD1 VD2 VD3 VD4 VD5 VD6 VD7 VD8 VD9 VD10 VD12 VD14 VD15 VD16 VD17 VD18 VD19 VD20 VD21 VD22: library part "ЧИП диод BAS16", "High-speed switching diodes", Manufacturer=Nexperia, Power/Voltage=100В, ComponentLink1Description=datasheet, ComponentLink1URL=https://assets.nexperia.com/documents/data-sheet/BAS16_SER.pdf, ManufacturerPartNumber=BAS16
VT1 VT2 VT3 VT4 VT5 VT6 VT7 VT8 VT9 VT10 VT12 VT14 VT15 VT16 VT17 VT18 VT19 VT20 VT21 VT22: library part "ЧИП транзистор PDTC114ET", "NPN resistor-equipped transistors;  R1 = 10 k, R2 = 10", ComponentLink1Description=datasheet, ComponentLink1URL=https://assets.nexperia.com/documents/data-sheet/PDTC114E_SER.pdf
VT11: library part "ЧИП транзистор SiSS10DN", "N-Channel 40 V (D-S) MOSFET", ComponentLink1Description=datasheet, ComponentLink1URL=https://www.vishay.com/docs/65439/siss10dn.pdf
XP1: library part "Соединитель 22232031", "Molex 2,54 мм pitch-3", Manufacturer=Connfly
XP2: library part "Соединитель PLS-6", "Вилка штыревая 2.54мм 1x6 прямая тип1", LatestRevisionDate=17-Jul-2002, LatestRevisionNote="Re-released for DXP Platform.", Publisher="Altium Limited"
XP3 XP4: library part "Соединитель FH12-10S-0.5SVA", "0.5mm  Pitch FPC/FFC Connector FH12 Series", Manufacturer=Hirose
XP5: library part "Соединитель XT30UPB-M", "AMASS XT30UPB-M  5 mm"
XW1 XW2 XW3 XW4 XW5 XW6 XW7: library part "Соединитель коаксиальный SMA-JR", "SMA-JR Разъем SMA гнездо на плату, прямой угол", ComponentLink1Description=datasheet, ComponentLink1URL=http://www.brownbear.ru/goods/2243.html
Z1: library part "Фильтр EMI EClamp2394P", "ESD/EMI Protection  for Color LCD Interfaces", Manufacturer=SEMTECH, PackageReference=SLP2116P8

## Free pads (board coordinates)
  round 5 hole 3.2: 1(24,24) 1(24,106) 1(70,24) 1(70,106) 1(184,24) 1(184,106)

## Via types
v1: diameter 0.8, hole 0.4, Top Layer to Bottom Layer, tented both sides, 1115 vias
v2: diameter 0.8, hole 0.4, Top Layer to Bottom Layer, 29 vias
v3: diameter 1, hole 0.6, Top Layer to Bottom Layer, tented both sides, 7 vias

## Nets (pads, with @x,y where several pads share a name; then routed paths per layer and width w, separated by ;. In a path a pad name is that pad's centre, name@x,y a point inside that pad or via, vN(x,y) a via of type N, cw(c..) or ccw(c..) an arc to the next point about the centre after c; other vN are vias at no path point)
ATU_LC_IN: K5.1 T1.1 T2.4 | length 42
  Top Layer w2: T1.1@37.482,68.859 37.482,68.355 38.654,67.183 46.118,67.183 ; 46.355,67.31 46.355,55.118 49.53,51.943 K5.1@58.801,51.943 ; 46.738,67.803 T2.4@53.15,67.803
ATU_LC_OUT: K1.6 K6.1 | length 4.3
  Top Layer w2: K1.6@54.483,63.246 K6.1@58.801,63.246
BYPASS0: D1.4 VT5.1 | length 38.9
  Top Layer w0.3: VT5.1@82.33,92.649 87.569,92.649 88.646,93.726 113.488,93.726 114.58,94.818 118.636,94.818 118.748,94.706 D1.4@120.314,94.706
CAP_SEL: D1.5 VT16.1 | length 40.2
  Top Layer w0.3: VT16.1@82.33,88.966 84.593,88.966 88.853,93.226 113.695,93.226 114.787,94.318 118.429,94.318 118.541,94.206 D1.5@120.314,94.206
CON_RS422A: XP3.2 XP4.2 | length 16.5
  Top Layer w0.25: XP4.2@146.444,99.901 146.444,101.105 147.086,101.747 153.71,101.747 154.838,102.875 157.476,102.875 158.575,101.776 XP3.2@158.575,99.822
CON_RS422B: XP3.3 XP4.3 | length 17.1
  Top Layer w0.25: XP4.3@145.944,99.901 145.944,101.599 146.05,101.705 v1(146.05,101.854) ; v1(147.828,100.965) 147.888,101.025 153.624,101.025 155.024,102.425 157.29,102.425 158.075,101.64 XP3.3@158.075,99.822
  Bottom Layer w0.25: v1(146.05,101.854) 146.085,101.819 146.974,101.819 v1(147.828,100.965)
CON_RS422Y: XP3.5 XP4.5 Z1.3 | length 29.4
  Top Layer w0.25: XP4.5@144.944,99.901 144.944,97.118 144.748,96.922 144.748,94.763 145.436,94.075 148.812,94.075 149.606,94.869 149.693,94.869 149.714,94.891 150.009,94.891 150.206,95.088 150.206,95.5 151.353,96.647 v1(157.099,96.647) ; Z1.3@146.447,97.796 146.447,98.314 146.685,98.552 147.951,98.552 149.374,97.129 149.374,96.752 v1(149.479,96.647) ; v1(156.464,98.171) 157.075,98.782 XP3.5@157.075,99.822
  Bottom Layer w0.25: v1(149.479,96.647) 149.479,95.631 v1(150.114,94.996) ; v1(156.464,98.171) 156.464,98.135 157.099,97.5 v1(157.099,96.647)
CON_RS422Z: XP3.4 XP4.4 Z1.4 | length 21.2
  Top Layer w0.2: 145.415,97.796 Z1.4@145.947,97.796
  Top Layer w0.25: 145.415,97.796 145.415,96.952 145.198,96.735 145.198,94.95 145.623,94.525 148.595,94.525 151.167,97.097 156.415,97.097 157.575,98.257 XP3.4@157.575,99.822 ; XP4.4@145.444,99.893 145.444,99.203 145.452,99.195 145.452,97.796
CON_TX_FAIL: XP3.8 XP4.8 | length 20.7
  Top Layer w0.25: XP4.8@143.444,99.901 143.444,101.406 147.114,105.076 154.122,105.076 155.439,103.759 v1(156.337,103.759) ; XP3.8@155.575,99.822 155.575,100.702 156.321,101.448 v1(156.321,101.473)
  Bottom Layer w0.25: v1(156.321,101.473) 156.329,101.481 156.329,103.751 v1(156.337,103.759)
CON_TXON: R10.1 R11.1 XP3.7 XP4.7 | length 17.3
  Top Layer w0.25: R10.1@142.875,97.224 R11.1@143.891,97.224 143.944,97.277 v1(143.944,98.589) XP4.7@143.944,99.901 ; v1(148.971,99.187) 149.569,98.589 155.677,98.589 156.075,98.987 XP3.7@156.075,99.822
  Bottom Layer w0.25: v1(143.944,98.589) 144.054,98.589 144.652,99.187 v1(148.971,99.187)
EXT_AMP: D1.22 VT3.1 | length 25
  Top Layer w0.25: D1.22@124.734,86.786 124.734,83.673 126.284,82.123 133.558,82.123 138.996,87.561 138.997,87.561 139.632,88.196 142.282,88.196 142.428,88.05 VT3.1@142.428,87.029